# Altium PCB CUv2.PcbDoc
Units mil, origin at the board's own origin, x right, y up, seen from the top; angles counter-clockwise.
Board outline 1496.06 x 1259.84 mil, 2 copper layers (Top Layer, Bottom Layer); 50 components, 41 nets, 186 pads, 21 vias.
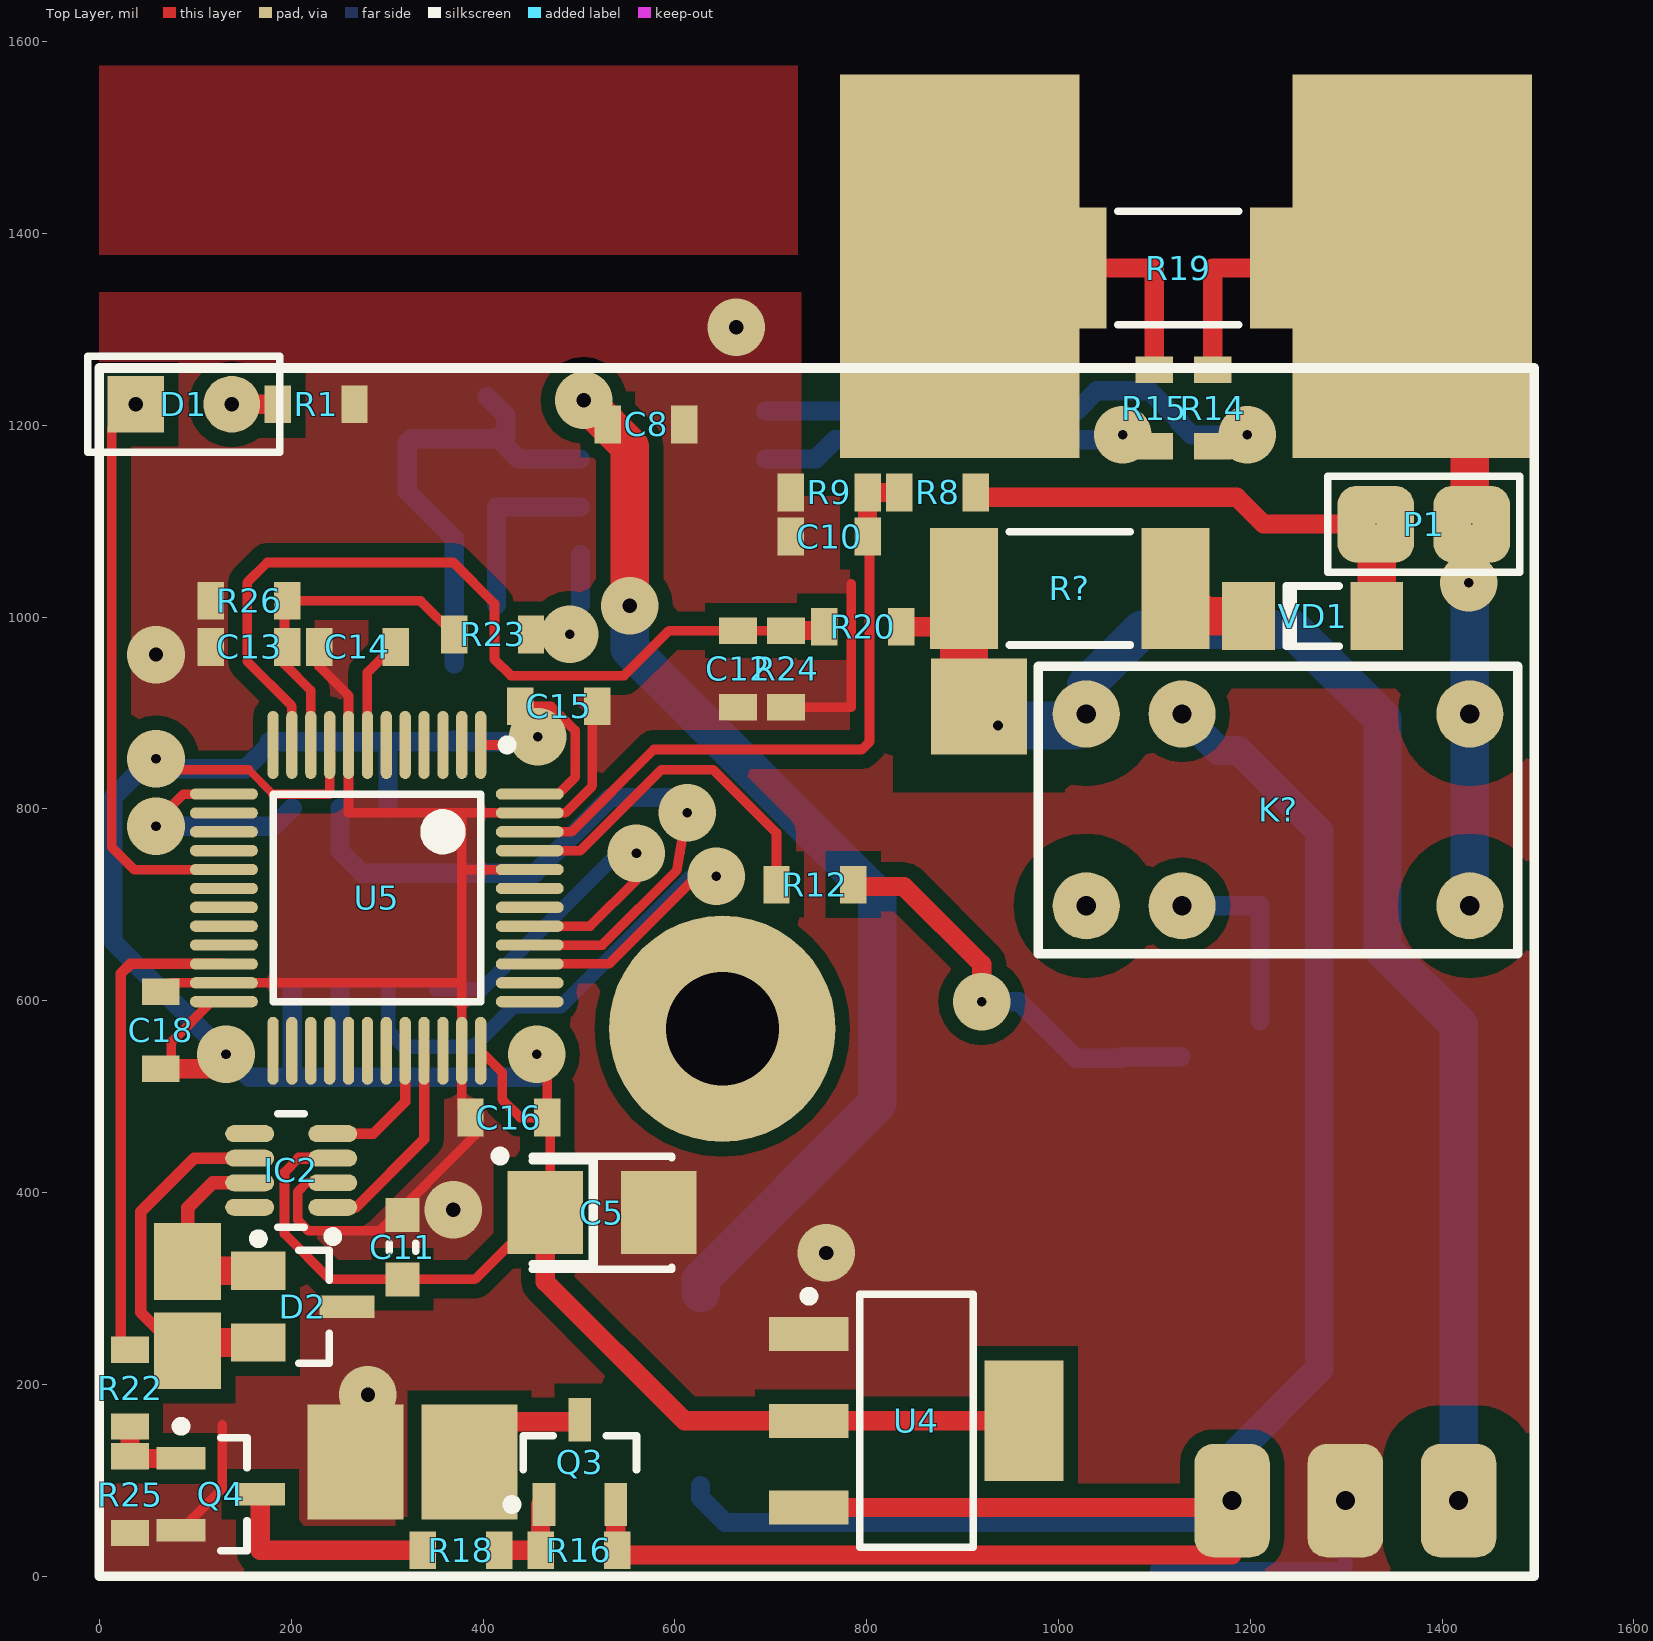
[diagram p0: Top Layer view]
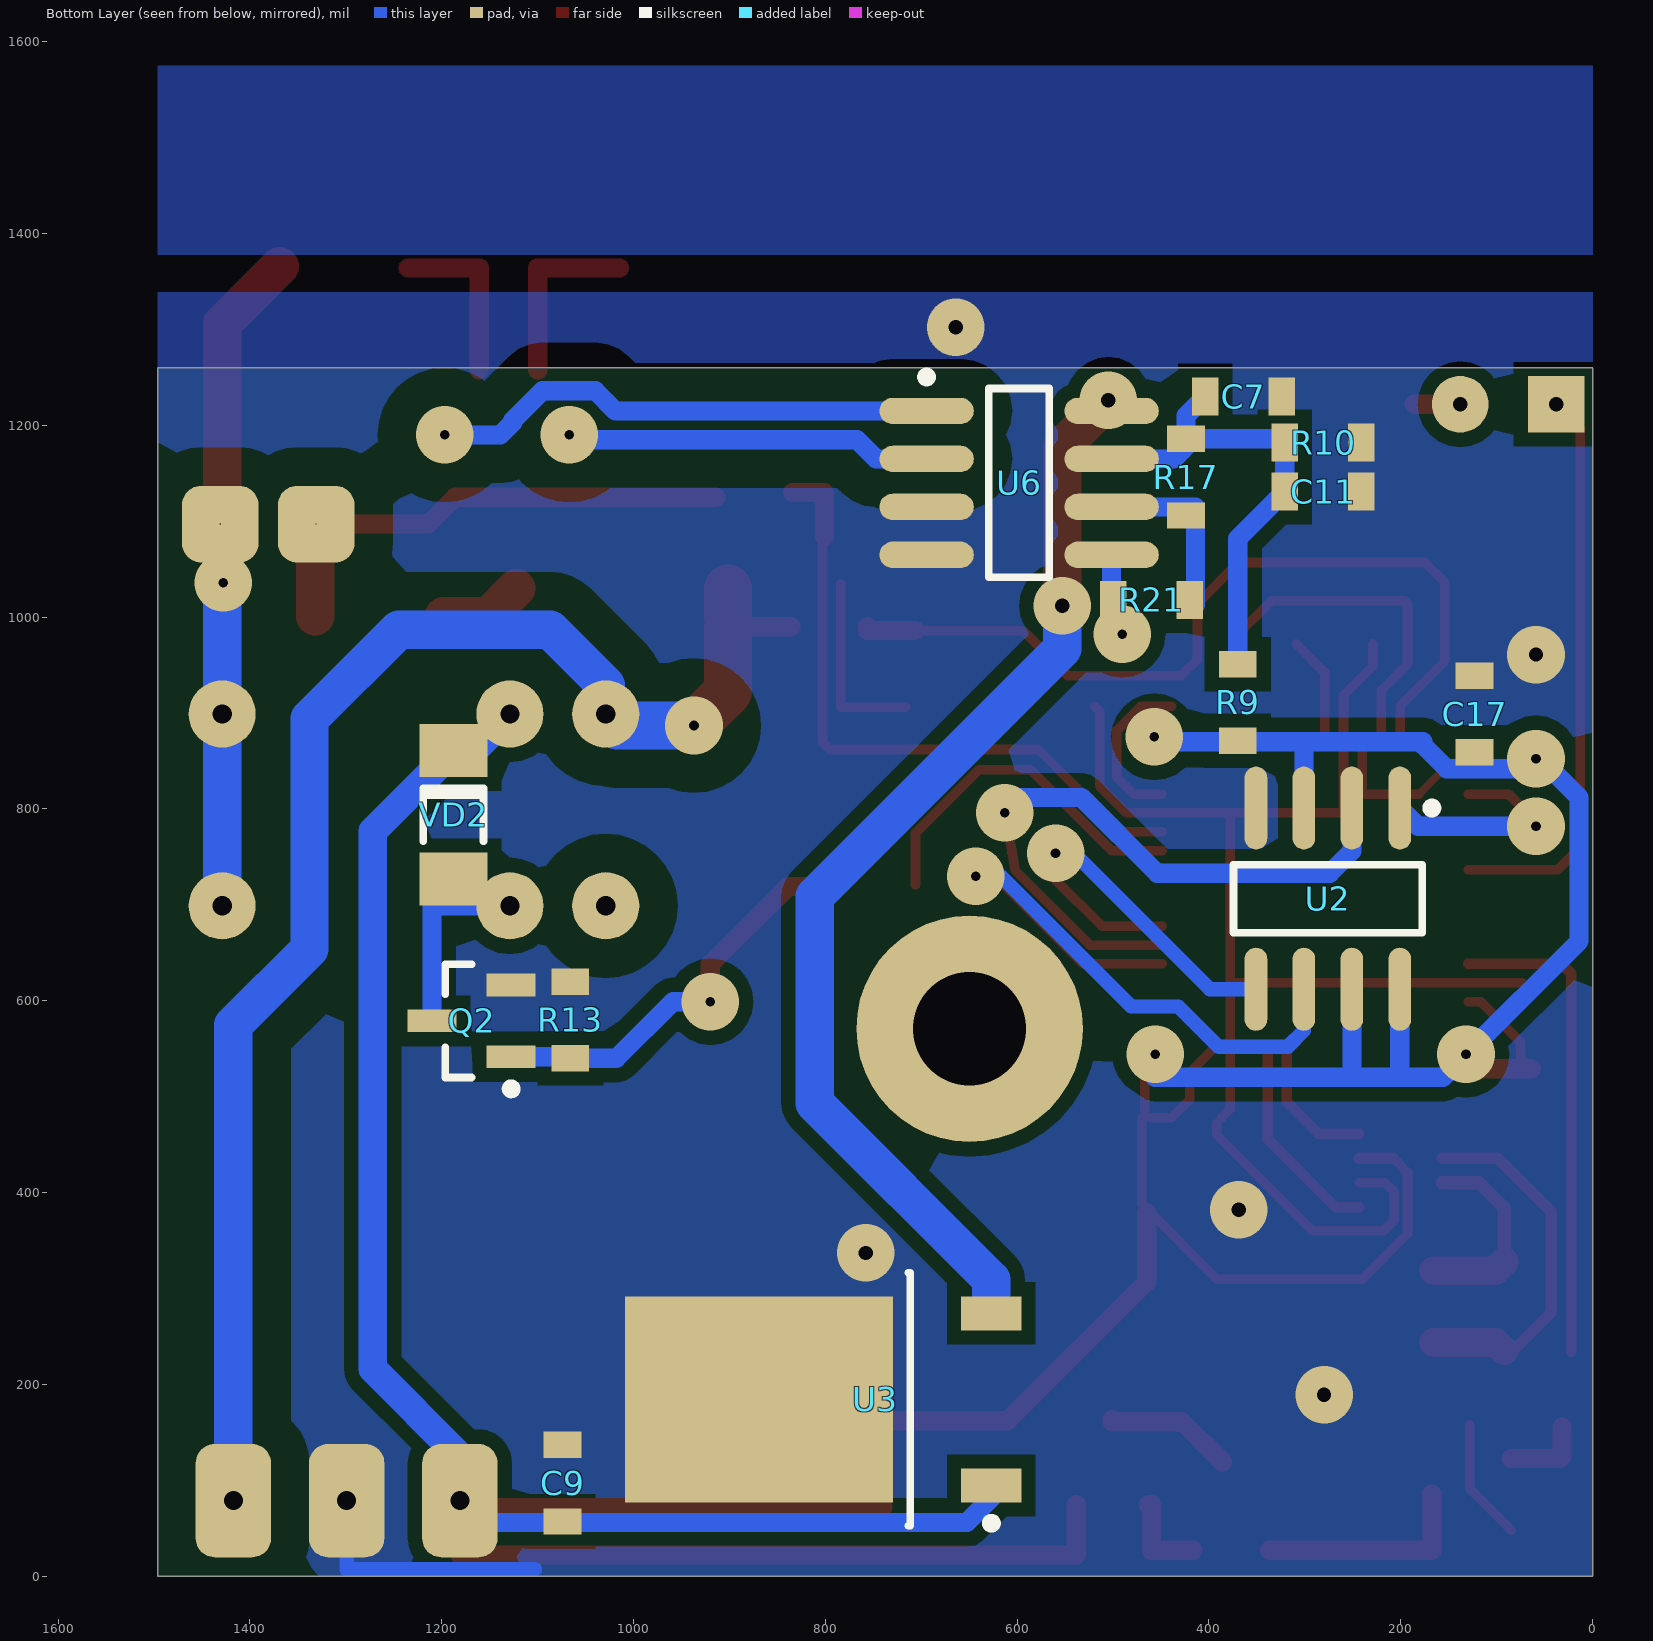
[diagram p1: Bottom Layer view, seen from below]

## Layer stack, top to bottom
Top Solder: solder mask 0.4, Solder Resist, Dk 3.5
Top Layer: signal copper 1.4
Dielectric 1: dielectric 12.6, FR-4, Dk 4.8
Bottom Layer: signal copper 1.4
Bottom Solder: solder mask 0.4, Solder Resist, Dk 3.5

## Board outline
0,0 0,1259.84 1496.06,1259.84 1496.06,0

## Design rules (kind name [scope] priority, off if disabled: settings)
Clearance Clearance_1 [InNetClass('HV')] p1: gap=5 ignorepadtopadclearanceinfootprint=FALSE except(0: Arc-Hole Track-Hole SMDPad-Hole THPad-Hole Via-Hole Fill-Hole Poly-Hole Region-Hole Text-Hole; 40: Arc-Fill Arc-Poly Arc-Region Track-Fill Track-Poly Track-Region SMDPad-Fill SMDPad-Poly SMDPad-Region THPad-Fill THPad-Poly THPad-Region Via-Fill Via-Poly Via-Region Fill-Fill Fill-Poly Fill-Region Poly-Poly Poly-Region Region-Region)
Clearance [All] p2: gap=5 ignorepadtopadclearanceinfootprint=FALSE except(0: Arc-Hole Track-Hole SMDPad-Hole THPad-Hole Via-Hole Fill-Hole Poly-Hole Region-Hole Text-Hole; 15: Arc-Fill Arc-Poly Arc-Region Track-Fill Track-Poly Track-Region SMDPad-Fill SMDPad-Poly SMDPad-Region THPad-Fill THPad-Poly THPad-Region Via-Fill Via-Poly Via-Region Fill-Fill Fill-Poly Fill-Region Poly-Poly Poly-Region Region-Region)
ComponentClearance [All] p1 off: gap=10 collisioncheckmode=3 verticalgap=10 showdistances=FALSE
Height [All] p1 off: minheight=0 maxheight=1000 prefheight=500
MinimumSolderMaskSliver [All] p1 off: minsoldermaskwidth=10
PolygonConnect [All] p1: connectstyle=Direct reliefconductorwidth=10 reliefentries=4 polygonreliefangle="90 Angle" airgapwidth=10
RoutingVias [All] p1: holewidth=28 width=60 viastyle="Through Hole" minholewidth=1 minwidth=1 maxholewidth=280 maxwidth=500
SilkToSilkClearance [All] p1 off: silktosilkclearance=10
SilkToSolderMaskClearance [IsPad] p1 off: minsilkscreentomaskgap=10 clearancetoexposedcopper=TRUE
SolderMaskExpansion [All] p1: expansion=4
Width [All] p1: maxlimit=200 minlimit=5 preferedwidth=10
25 further rules are at their usual default settings.

## Classes and differential pairs
net class HV: 48S 48V 48V_CONN ___1 NetK?_2 NetP1_2 NetR14_1 NetR15_1 NetR?_1
net class CAN: CAN_RX CAN_TX

## Components (designator, comment, footprint, x,y, rotation, side; value= is the part's Value field where it differs from the comment)
C5 "1000u 25V" RR_B 524,379 r0 top value=100pF
C7 "Cap" 0603x 364,1230 r180 bottom value=10n
C8 "Cap" 0603x 570,1201 r0 top value=10n
C9 "Cap" 0603x 1074,97 r90 bottom value=10n
C10 "Cap" 0603x 761,1084 r180 top value=10n
C11 "Cap" 0603x 281,1131 r180 bottom value=10n
C11 "0.1u" CAPC1608X08N(0603) 316,343 r270 top value="CAP CER 0.1UF 50V X7R 0603"
C12 "Cap" 0603x 666,946 r270 top value=10n
C13 "Cap" 0603x 156,969 r180 top value=10n
C14 "Cap" 0603x 269,969 r0 top value=100nF
C15 "Cap" 0603x 479,907 r180 top value=100nF
C16 "Cap" 0603x 426.98,478.17 r0 top value=100nF
C17 "Cap" 0603x 123,899 r270 bottom value=100nF
C18 "Cap" 0603x 63.98,569.17 r270 top value=100nF
D1 "LED0" HDR1X2#1 38,1222 r0 top
D2 "NUP2105LT1G" SOT-23_M 212,281 r0 top
IC2 "TCAN332GDCNT" SOT23-8_L 200,423 r180 top
K? "Relay" RELAY_12V_MICRO 1129,799 r180 top
P1 "Header 2" HDR1X2#2 1431,1097 r180 top
Q2 "2N7002" SOT23_N 1169,579 r0 bottom
Q3 "IRLML6401" Micro3_N 501,119 r90 top
Q4 "2N7002" SOT23_N 126.34,85.4 r0 top
R1 "Res1" 0603x 226,1222 r0 top value=1K
R8 "Res1" 0603x 874,1130 r0 top value=18k
R9 "Res1" 0603x 370,911 r270 bottom value=18k
R9 "Res1" 0603x 761,1130 r0 top value=18k
R10 "Res1" 0603x 281,1182 r0 bottom value=18k
R12 "Res1" 0603x 746,721 r0 top value=1K
R13 "Res1" 0603x 1066,580 r270 bottom value=1K
R14 "Res1" 0603x 1161,1218 r90 top value=1K
R15 "Res1" 0603x 1100,1218 r90 top value=1K
R16 "Res1" 0603x 500,27 r180 top value=1K
R17 "Res1" 0603x 424,1146 r270 bottom value=1K
R18 "Res1" 0603x 377,27 r180 top value=1K
R19 "Res1" 2512 1125,1364 r0 top value=10mR
R20 "Res1" 0603x 796,990 r180 top value=1K
R21 "Res1" 0603x 460,1018 r0 bottom value=1K
R22 "Res1" 0603x 32,196 r270 top value=1K
R23 "Res1" 0603x 410,982 r180 top value=1K
R24 "Res1" 0603x 716,946 r270 top value=1K
R25 "Res1" 0603x 32,85 r90 top value=1K
R26 "Res1" 0603x 156,1017 r0 top value=1K
R? "Res1" 2512 1012,1030 r180 top value=18k
U2 "25AA010A-I/MS" SO-8_N 276,706.49 r270 bottom
U3 "LM78M05CDTX" TO-252AA_L 802.07,184.3 r0 bottom
U4 "REG1117-3.3" SOt-223_L 852,162 r0 top
U5 "STM32F303C8T6" LQFP48_N 289.29,707.27 r270 top
U6 "MAX9918" SO8_M 598,1140 r180 bottom
VD1 "Diode" SOD-80/MLL34 1265,1001 r180 top
VD2 "Diode" SOD-80/MLL34 1188,794 r90 bottom

## Footprints (in the part's own frame and the unit in brackets; to place one, negate y for a bottom-side part, rotate by r counter-clockwise, add the part's x,y. Pads: shape width x height; smd on the part's side, far side on the other; paste and mask are expansions set on the pad)
0603x [mm] "Chip Resistor; Body 1.6 x 0.8 mm (LxW typ)"
  rect 0.7x1 smd: 1(-1.016,0) 2(1.016,0)
2512 [mm] "Chip Resistor; Body 6.4 x 3.2 mm (LxW typ)"
  rect 1.8x3.2 smd: 1(-2.8,0) 2(2.8,0)
  silkscreen extent -1.6,-1.5 1.6,1.5
CAPC1608X08N(0603) [mm] "Chip Capacitor, 2-Leads, Body 1,60x0,80mm, IPC Medium Density"
  rect 0.9x0.9 smd: 1(-0.85,0) 2(0.85,0)
  silkscreen extent -0.1,-0.35 0.1,0.35, body extent -0.8,-0.4 0.8,0.4, height 0.8
HDR1X2#1 [mm] "Connector; Header; 2 Position"
  rect 1.5x1.5 hole 0.381: 1(0,0)
  round 1.5 hole 0.381: 2(2.54,0)
  silkscreen extent -1.27,-1.27 3.81,1.27
HDR1X2#2 [mm] "Connector; Header; 2 Position"
  rrect50% 2.032x2.032 hole 0.025: 1(0,0) 2(2.54,0)
  silkscreen extent -1.27,-1.27 3.81,1.27
LQFP48_N [mm] "Thin QFP, 48-Leads, Body 7x7mm, Pitch 0.5mm, IPC Medium Density"
  oval 1.8x0.3 smd: 1(-4.05,2.75) 2(-4.05,2.25) 3(-4.05,1.75) 4(-4.05,1.25) 5(-4.05,0.75) 6(-4.05,0.25) 7(-4.05,-0.25) 8(-4.05,-0.75) 9(-4.05,-1.25) 10(-4.05,-1.75) 11(-4.05,-2.25) 12(-4.05,-2.75) 25(4.05,-2.75) 26(4.05,-2.25) 27(4.05,-1.75) 28(4.05,-1.25) 29(4.05,-0.75) 30(4.05,-0.25) 31(4.05,0.25) 32(4.05,0.75) 33(4.05,1.25) 34(4.05,1.75) 35(4.05,2.25) 36(4.05,2.75)
  oval 0.3x1.8 smd: 13(-2.75,-4.05) 14(-2.25,-4.05) 15(-1.75,-4.05) 16(-1.25,-4.05) 17(-0.75,-4.05) 18(-0.25,-4.05) 19(0.25,-4.05) 20(0.75,-4.05) 21(1.25,-4.05) 22(1.75,-4.05) 23(2.25,-4.05) 24(2.75,-4.05) 37(2.75,4.05) 38(2.25,4.05) 39(1.75,4.05) 40(1.25,4.05) 41(0.75,4.05) 42(0.25,4.05) 43(-0.25,4.05) 44(-0.75,4.05) 45(-1.25,4.05) 46(-1.75,4.05) 47(-2.25,4.05) 48(-2.75,4.05)
  silkscreen extent -4.17,-2.75 2.75,3.58, body extent -3.5,-3.5 3.5,3.5, height 1.6
Micro3_N [mm] "SOT23, 3-Leads, Body 2.9x1.3mm, Pitch 0.95mm, Lead Span 2.3mm, IPC Medium Density"
  rect 1.15x0.6 smd: 1(-1.125,0.95) 2(-1.125,-0.95) 3(1.125,0)
  silkscreen extent -1.25,-1.5 0.7,1.92, body extent -0.7,-1.5 0.7,1.5, height 1.12
RELAY_12V_MICRO [mil]
  round 70 hole 20: 1(-300,-100) 1(-300,100) 2(100,100) 3(100,-100) 4(0,100) 5(0,-100)
  silkscreen extent -350,-150 150,150, body extent -350,-150 150,150, height 390
RR_B [mm] "Capacitor, SM Tantalum; Body 3.5 x 2.8 mm (LxW typ)"
  rect 2x2.2 smd: 1(-1.5,0) 2(1.5,0)
  silkscreen extent -2.82,-1.5 1.85,1.62, body extent -1.5,-1.5 1.5,1.5, height 2.1
SO8_M [mm] "SOIC, 8-Leads, Body 4.9x3.9mm, Pitch 1.27mm, IPC Low Density"
  oval 2.5x0.7 smd: 1(-2.45,1.905) 2(-2.45,0.635) 3(-2.45,-0.635) 4(-2.45,-1.905) 5(2.45,-1.905) 6(2.45,-0.635) 7(2.45,0.635) 8(2.45,1.905)
  silkscreen extent -2.58,-2.5 0.8,2.93, body extent -2,-2.5 2,2.5, height 1.75
SO-8_N [mm] "SOIC, 8-Leads, Body 4.9x3.9mm, Pitch 1.27mm, IPC Medium Density"
  oval 2.2x0.6 smd: 1(-2.4,1.905) 2(-2.4,0.635) 3(-2.4,-0.635) 4(-2.4,-1.905) 5(2.4,-1.905) 6(2.4,-0.635) 7(2.4,0.635) 8(2.4,1.905)
  silkscreen extent -2.52,-2.5 0.9,2.88, body extent -2,-2.5 2,2.5, height 1.75
SOD-80/MLL34 [mm] "Metal Electrode Face (MELF) Diode; Body 3.5 x 1.7 mm (LxDia)"
  rect 1.4x1.8 smd: 1(-1.7,0) 2(1.7,0)
  silkscreen extent -0.7,-0.8 0.7,0.8
SOT23-8_L [mm] "SOP, 8-Leads, Body 2.9x1.6mm, Pitch 0.65mm, IPC High Density"
  oval 1.3x0.45 smd: 1(-1.1,0.975) 2(-1.1,0.325) 3(-1.1,-0.325) 4(-1.1,-0.975) 5(1.1,-0.975) 6(1.1,-0.325) 7(1.1,0.325) 8(1.1,0.975)
  silkscreen extent -1.22,-1.5 0.35,1.87, body extent -0.88,-1.5 0.88,1.5, height 1.45
SOT23_N [mm] "SOT23, 3-Leads, Body 2.9x1.3mm, Pitch 0.95mm, Lead Span 2.3mm, IPC Medium Density"
  rect 1.3x0.6 smd: 1(-1.05,0.95) 2(-1.05,-0.95) 3(1.05,0)
  silkscreen extent -1.17,-1.5 0.7,1.92, body extent -0.7,-1.5 0.7,1.5, height 1.1
SOT-23_M [mm] "SOT23, 3-Leads, Body 2.9x1.3mm, Pitch 0.95mm, Lead Span 2.5mm, IPC Low Density"
  rect 1.45x1.016 smd: 1(-1.175,0.95) 2(-1.175,-0.95)
  rect 1.45x0.6 smd: 3(1.175,0)
  silkscreen extent -1.3,-1.5 0.7,1.92, body extent -0.7,-1.5 0.7,1.5, height 1.1
SOt-223_L [mm] "SOT223, 4-Leads, Body 6.5x3.5mm, Pitch 2.3mm, Lead Span 7mm, IPC High Density"
  rect 2.1x0.9 smd: 1(-2.85,2.3) 2(-2.85,0) 3(-2.85,-2.3)
  rect 2.1x3.2 smd: 4(2.85,0)
  silkscreen extent -2.97,-3.35 1.5,3.42, body extent -1.85,-3.35 1.85,3.35, height 1.8
TO-252AA_L [mm] "D-PAK, 4-Leads, Body 6.1x6.5mm, Pitch 2.28mm, Lead Span 9.9mm, IPC High Density"
  rect 1.6x0.9 smd: 1(-4.45,2.28) 3(-4.45,-2.28)
  rect 7.1x5.45 smd: 4(1.7,0)
  silkscreen extent -4.57,-3.35 -2.25,3.4, body extent -2.3,-3.37 4.05,3.37, height 2.38

## Part data
C5: library part Cap, "Capacitor", LatestRevisionDate=17-Jul-2002, LatestRevisionNote="Re-released for DXP Platform.", PackageDescription="Radial Cap, Thru-Hole; 2 Leads; 0.3 in Pin Spacing", PackageReference=RAD-0.3, Published=8-Jun-2000, Publisher="Altium Limited"
C7 C8 C9 C10 C11 C12 C13 C14 C15 C16 C17 C18: "Capacitor", LatestRevisionDate=17-Jul-2002, LatestRevisionNote="Re-released for DXP Platform.", PackageDescription="Radial Cap, Thru-Hole; 2 Leads; 0.3 in Pin Spacing", PackageReference=RAD-0.3, Published=8-Jun-2000, Publisher="Altium Limited"
C11: library part "Ceramic Chip Capacitor", Package=0603, Distributor="AVX Corporation", Order Number=06035C104KAT2A
D1: "Typical INFRARED GaAs LED", LatestRevisionDate=08-Jul-2005, LatestRevisionNote="Mech Layer 1 removed.", PackageDescription="LED; 2 Leads", PackageReference=LED-0, Published=8-Jun-2000, Publisher="Altium Limited"
D2: library part BAT54A, "Schottky Barrier Double Diode", Package=SOT23, ComponentLink1Description="Manufacturer Link", ComponentLink1URL=http://www.semiconductors.philips.com/, Distributor="ON Semiconductor", LatestRevisionNote="IPC-7351 Footprint Added.", Order Number=NUP2105LT1G, PackageDescription="3-Pin SOT-23 Package 0.95 mm Pitch, 2.3 mm Lead Span"
IC2: Package=SOT23-8, Distributor="Texas Instruments", Order Number=TCAN332GDCNT
K?: "SPDT Relay", LatestRevisionDate=17-Jul-2002, LatestRevisionNote="Re-released for DXP Platform.", PackageReference=MODULE5B, Published=8-Jun-2000, Publisher="Altium Limited"
P1: "Header, 2-Pin", LatestRevisionDate=17-Jul-2002, LatestRevisionNote="Re-released for DXP Platform.", Publisher="Altium Limited"
Q2 Q4: "N-channel Enhancement Mode Field-effect Transistor", ComponentLink1Description="Manufacturer Link", ComponentLink1URL=http://www.semiconductors.philips.com/, ComponentLink2Description=Datasheet, ComponentLink2URL=http://www.semiconductors.philips.com/acrobat/datasheets/2N7002_4.pdf, DatasheetVersion=27-Jul-2000, LatestRevisionDate=12-Dec-2006, LatestRevisionNote="IPC-7351 Footprint Added.", PackageDescription="3-Pin SOT-23 Package 0.95 mm Pitch, 2.3 mm Lead Span", PackageReference=SOT23, PackageVersion=May-1999, Published=17-Sep-2003, Publisher="Altium Limited"
Q3: "HEXFET Power MOSFET", ComponentLink1Description="Manufacturer Link", ComponentLink1URL=http://www.irf.com/, ComponentLink2Description=Datasheet, ComponentLink2URL=http://www.irf.com/product-info/datasheets/data/IRLML6401.pdf, DatasheetVersion=2-Jul-2001, PackageDescription="3-Pin SOT-23 Package 0.95 mm Pitch, 2.3 mm Lead Span", PackageReference=Micro3, PackageVersion=Jul-2001, Published=17-Sep-2003, Publisher="Altium Limited"
R1 R8 R9 R9 R10 R12 R13 R14 R15 R16 R17 R18 R19 R20 R21 R22 R23 R24 R25 R26 R?: "Resistor", LatestRevisionDate=17-Jul-2002, LatestRevisionNote="Re-released for DXP Platform.", PackageDescription="Axial Device, Thru-Hole; 2 Leads; 0.3 in Pin Spacing", PackageReference=AXIAL-0.3, Published=8-Jun-2000, Publisher="Altium Limited"
U2: "1K SPI Bus Serial EEPROM, 8-Pin MSOP, Industrial Temperature", Supplier Part Number 1=25AA010A-I/MS-ND, ComponentLink1Description=Datasheet, ComponentLink1URL=http://ww1.microchip.com/downloads/en/DeviceDoc/21832E.pdf, ComponentLink2Description="Packaging Specification", ComponentLink2URL=http://www.microchip.com/stellent/groups/techpub_sg/documents/packagingspec/en012702.pdf, ComponentLink3Description="Microchip.com Home", ComponentLink3URL=http://www.microchip.com/, DatasheetVersion="revE, Sep-2008", LatestRevisionDate=02-Dec-2009, LatestRevisionNote="Updated to datasheet revision E, Jan-2008", PackageDescription="8-Lead Plastic Micro Small Outline Package (MS) [MSOP]", PackageReference=MSOP-MS8, PackageVersion="revBB, Aug-2009", Published=29-Jan-2009, Publisher="Altium Limited", Supplier 1=Digi-Key, Supplier 2=Farnell, Supplier Part Number 2=1331337
U3: "3-Terminal Positive Voltage Regulators, 3-pin TO-252", Manufacturer="National Semiconductor", PackageTopMarking=NSUZXYTT*LM78M05*CDT, PowerWise=N, Code_JEDEC=TO-252-AA, ComponentLink1Description="LM78M05 Datasheet", ComponentLink1URL=http://www.national.com/ds/LM/LM78M05.pdf, ComponentLink2Description="LM78M05 Web Page", ComponentLink2URL=http://www.national.com/pf/LM/LM78M05.html, ComponentLink3Description="TD03B Package Page", ComponentLink3URL=http://www.national.com/packaging/folders/td03b.html, CompType="LDO IC", DatasheetVersion=Aug-2005, PackageDescription="TO252, Molded, Jedec, 6.8 x 6.10 x 2.30mm Body, 3 Lead, 2.28mm Pitch, Surface Mount", PackageReference=TD03B, PackageVersion="revD, Feb-2009", PartNumber=LM78M05CDTX, PinCount=3, Published=1-Mar-2010, Publisher="Altium Limited", RoHS=N
U4: "800mA and 1A Low Dropout Positive Regulator 2.85V, 3.3V, 5V, and Adjustable", ComponentLink1Description="Manufacturer Link", ComponentLink1URL=http://www.ti.com/, ComponentLink2Description=Datasheet, ComponentLink2URL=http://www-s.ti.com/sc/ds/REG1117.pdf, DatasheetVersion=Sep-1997, LatestRevisionDate=17-Jul-2002, LatestRevisionNote="Re-released for DXP Platform.", PackageDescription="SOT-223/SC-73; 4 Leads; Body 6.7 x 7.3 mm, inc. leads (LxW max)", PackageReference=ZZ311, PackageVersion=revC, Published=8-Jun-2000, Publisher="Altium Limited"
U5: library part STM32F103C6T6, "STM32 ARM-based 32-bit MCU with 32 Kbytes Flash, 48-pin LQFP, Industrial Temperature", ComponentLink1Description="Manufacturer Link", ComponentLink1URL=www.st.com/stm32, ComponentLink2Description=Datasheet, ComponentLink2URL=http://www.st.com/stonline/products/literature/ds/13587.pdf, DatasheetVersion="rev6, Mar-2008", PackageDescription="48-Pin Low-Profile Quad Flat Pack, 7 x 7 mm Body, 0.5 mm Pitch (LQFP48)", PackageReference=LQFP48, PackageVersion=Mar-2008, Published=30-May-2008, Publisher="Altium Limited"
VD1 VD2: "Default Diode", Code_JEDEC=DO-214-AB, LatestRevisionDate=17-Jul-2002, LatestRevisionNote="Re-released for DXP Platform.", PackageDescription="DO-214-AB/SMC; 2 C-Bend Leads; Body 7.9 x 5.9 mm, inc. leads (LxW)", PackageReference=SMC, PackageVersion=Sep-1996, Published=8-Jun-2000, Publisher="Altium Limited"

## Free pads (board coordinates)
  rect 250x400 smd: 2(897,1366) 2(1369,1366)
  rect 100x100 smd: 2(917,907)
  rect 100x120 smd: 3(267,119) 3(386,119)
  round 236.22 hole 118.11: 4(649.61,570.87)
  rrect50% 78.74x118.11 hole 20: 5(1417.32,78.74) 6(1299.21,78.74) 7(1181.1,78.74)
  rect 70x80 smd: 8(92,235) 9(92,328)

## Via types
v1: diameter 60, hole 10, Top Layer to Bottom Layer, 14 vias
v2: diameter 60, hole 15, Top Layer to Bottom Layer, 7 vias

## Nets (pads, with @x,y where several pads share a name; then routed paths per layer and width w, separated by ;. In a path a pad name is that pad's centre, name@x,y a point inside that pad or via, vN(x,y) a via of type N, cw(c..) or ccw(c..) an arc to the next point about the centre after c; other vN are vias at no path point)
3V3: C5.1 C11.2@316,309.54 C15.2 C16.2 C17.2 C18.2 IC2.3 R9.2@370,871 U2.3 U2.7 U2.8 U4.2 U4.4 U5.1 U5.9 U5.24 U5.36 U5.48 | length 3389.2
  Top Layer w8: 155.56,841 181.02,815.54
  Top Layer w10: C18.2 74.98,540.17 74.98,557.17 116.81,599 U5.24 ; v1@68,841 155.56,841 ; 181.02,815.54 240.08,815.54 U5.9 ; 207.8,435.8 193,421 193,357 240.46,309.54 316,309.54 391.48,309.54 470,388.06 470,478.17 C16.2 466.98,533.17 v1(455.98,544.17) ; U5.36 419.98,525.4 419.98,497.17 438.98,478.17 C16.2@460,478.17 ; U5.1 448.53,866.72 v1(456.98,875.17) ; C15.2 471,907 496,882 496,833 478.54,815.54 U5.48
  Top Layer w12: 207.8,435.8 IC2.3
  Top Layer w20: C18.2 116.98,529.17 v1(131.98,544.17) ; C5.1 464.94,307.06 610,162 U4.2 U4.4
  Bottom Layer w20: U2.8 201,522.17 199,520.17 ; U2.7 251,522.17 253,520.17 ; U2.3 301,870 ; R9.2@369,872 370,871 R9.2@371,870 ; v1@455.98,520.17 253,520.17 ; v1(456.98,875.17) 456.98,870 R9.2@371,870 ; 199,520.17 155.98,520.17 v1(131.98,544.17) 14,662.14 14,812 54.19,852.19 v1(59,852.19) 70.19,852.19 80.37,842 152,842 177,867 177,870 301,870 ; 199,520.17 253,520.17 ; 301,870 R9.2@371,870
5V: C8.1 U3.3 U6.8 | length 1146.2
  Top Layer w40: v2(505,1226) C8.1 553,1178 v2(553,1012)
  Bottom Layer w20: U6.8 505,1218.46 v2(505,1226)
  Bottom Layer w40: v2(553,1012) 553,967 811,709 811,493 626.87,308.87 626.87,295.28
12V: C9.1 K?.5 pad.7 Q3.2 R16.1 U3.1 U4.3 VD2.2 | length 2716
  Top Layer w20: Q3.2 538.4,22 1181.1,22 1181.1,71.45 U4.3
  Bottom Layer w20: U3.1 626.87,81.79 652.66,56 1181.1,56 pad.7
  Bottom Layer w30: K?.5 1167.07,860.93 VD2.2 1272,776.93 1272,216 1181.1,125.1 pad.7
48S: K?.1 P1.1 pad.2@1369,1366 R14.2 R19.2 | length 870.5
  Top Layer w20: R14.2 1161,1364 R19.2
  Top Layer w40: pad.2@1369,1366 1429,1306 v1@1429,1038
  Bottom Layer w40: v1(1428,1036) 1429,1035 1429,899 K?.1@1429,699
48V: K?.3 pad.2@917,907 pad.5 R20.1 R?.2 | length 1553
  Top Layer w20: R20.1 901.76,990 R?.2@901.76,1000
  Top Layer w50: R?.2@901.76,990 901.76,922.24 917,907 pad.2@925,899 ; R?.2@901.76,1000 R?.2
  Bottom Layer w40: K?.3 1029,929 1087,987 1245,987 1338,894 1338,654 1417.32,574.68 pad.5
  Bottom Layer w50: v1(937,887) 1017,887 K?.3
48V_CONN: pad.2@897,1366 R15.2 R19.1 | length 191.2
  Top Layer w20: R19.1 1100,1364 R15.2
___1: K?.2
BTN: C10.1 R8.1 R9.2@801,1130 U5.46 | length 687
  Top Layer w10: U5.46 492.17,776.17 578,862 795,862 803,870 803,1082 C10.1
  Top Layer w20: C10.1 801,1130 R8.1
C\S\: U2.1 U5.13 | length 245.6
  Top Layer w10: v1@60,782 v1(59,782) 54,782 87.54,815.54 U5.13
  Bottom Layer w20: v1(59,782) 182.02,782 U2.1
CAN_H: D2.1 IC2.7 pad.9 | length 209.3
  Top Layer w14: pad.9 92,384 118.2,410.2 IC2.7
  Top Layer w30: pad.9 101.6,318.4 D2.1
CAN_L: D2.2 IC2.6 pad.8 | length 384.7
  Top Layer w12: pad.8 83,235 43,275 43,380 98.79,435.79 IC2.6
  Top Layer w30: pad.8 100.6,243.6 D2.2
CAN_RX: IC2.4 U5.32 | length 142.4
  Top Layer w11: IC2.4 285.39,461.39 318.82,494.82 U5.32
CAN_TX: IC2.1 U5.33 | length 216.9
  Top Layer w11: IC2.1 267.61,384.61 338.5,455.5 U5.33
GND: C5.2 C7.2 C8.2 C9.2 C10.2 C11.1@316,376.46 C11.2@241,1131 C12.2 C13.2 C14.1 C15.1 C16.1 C17.1 C18.1 D2.3 IC2.2 pad.3@267,119 pad.6 Q2.2 Q4.2 R1.2 R9.1@721,1130 R10.1 R13.1 R24.2 R25.1 R26.1 U2.4 U3.4 U4.1 U5.8 U5.23 U5.35 U5.44 U5.47 U6.3 U6.4 | length 2155.2
  Top Layer w10: C18.1 73.5,618.69 U5.23 377.87,618.69 ; Q4.2 128,91 128,158 ; 207,371 207,401 216.2,410.2 IC2.2 ; 208,371 208,370 218,360 292,360 391.91,459.91 C16.1@391.91,472.09 ; C14.1@229,972 C14.1 229,949 259.76,918.24 U5.8 259.76,795.85 377.87,795.85 ; C16.1 377.87,487.27 U5.35 377.87,618.69 ; U5.44 377.87,736.8 ; C15.1 514,902 514,824 485.85,795.85 U5.47 377.87,795.85 ; R24.2 784,906 784,1034.69 ; 377.87,618.69 377.87,736.8 ; 377.87,736.8 377.87,795.85
  Bottom Layer w15: 1103,7 1299.21,7 pad.6
  other v2: 280,189 758,337 369,382 59,961 663.97,1302.41
I_SNS: C13.1 R23.2 R26.2 U5.10 | length 351.4
  Top Layer w10: U5.10 220.39,923.61 193,951 193,1014 R26.2 335,1017 R23.2
LED: D1.1 U5.17 | length 598.8
  Top Layer w10: D1.1 13,1197 13,760 36.2,736.8 U5.17
LIGHT: pad.3@386,119 Q3.3 | length 134.7
  Top Layer w20: pad.3@386,119 428,161 501,161 Q3.3
NetC14_2: C14.2 U5.7 | length 117.5
  Top Layer w10: U5.7 279.45,942.45 C14.2@309,972
NetD1_2: D1.2 R1.1 | length 48
  Top Layer w20: D1.2 R1.1
NetK?_4: K?.4 Q2.3 VD2.1 | length 201.3
  Bottom Layer w20: K?.4 1210.34,699 Q2.3
NetP1_2: P1.2 R8.2 VD1.1 | length 525
  Top Layer w20: R8.2@914,1125 1186,1125 1214,1097 P1.2
  Top Layer w40: P1.2 1331.93,1096.07 VD1.1
NetQ2_1: Q2.1 R12.2 R13.2 | length 441.1
  Top Layer w20: R12.2 788,719 839,719 920,638 v1(920,599)
  Bottom Layer w20: v1(920,599) 959,599 1018,540 R13.2 1066,541.6 Q2.1
NetQ3_1: Q3.1 R16.2 R18.1 | length 94.3
  Top Layer w20: R18.1 R16.2 460,74.71 Q3.1
NetQ4_1: Q4.1 R22.2 R25.2 | length 84.9
  Top Layer w20: R22.2 R25.2 34.2,122.8 Q4.1
NetQ4_3: Q4.3 R18.2 | length 227.7
  Top Layer w20: Q4.3 167.68,27 R18.2
NetR14_1: R14.1 U6.1 | length 531.5
  Bottom Layer w20: U6.1 1019,1215 1040,1236 1095,1236 1126,1205 1126,1203 1139,1190 v1(1197,1190)
NetR15_1: R15.1 U6.2 | length 382.9
  Bottom Layer w20: U6.2 747,1165 767,1185 1062,1185 v1(1067,1190)
NetR17_2: R17.2 R21.1 U6.6 | length 189.5
  Bottom Layer w20: R21.1@414,1013 414,1115 U6.6
NetR21_2: R21.2 R23.1 U6.5 | length 52
  Bottom Layer w20: R21.2@501.54,1013 U6.5
  other v1: 490.5,982
NetR?_1: R?.1 VD1.2 | length 87.8
  Top Layer w40: R?.1 1151.24,1001 VD1.2
POWER: R12.1 U5.45 | length 373.6
  Top Layer w10: U5.45 501.48,756.48 586,841 640,841 706,775 R12.1
PWM_LIGHT: R22.1 U5.22 | length 506.1
  Top Layer w11: R22.1@22,234 22,628 32.37,638.37 U5.22
SCK: U2.6 U5.39 | length 698
  Top Layer w10: U5.39 531.37,638.37 623,730 v1(643,730)
  Bottom Layer w15: U2.6 301,569 318,552 390,552 432,594 481,594 617,730 v1(643,730)
SCL: U5.6
SDA: U5.5
SI: U2.5 U5.41 | length 427.1
  Top Layer w10: U5.41 511.74,677.74 560,726 v1(560,754)
  Bottom Layer w15: U2.5 399,612 v1@541,754
  Bottom Layer w20: v1@541,754 v1(560,754)
SO: U2.2 U5.40 | length 727.5
  Top Layer w10: U5.40 524.06,658.06 602,736 605.37,754.37 v1(613,796) ccw(c613,780) v1@597,780
  Bottom Layer w20: U2.2 251,756 274,733 454,733 533,812 597,812 v1(613,796)
SWCLK: U5.37
SWDIO: U5.34
V_SNS: C12.1 R20.2 R24.1 U5.11 | length 905.7
  Top Layer w10: U5.11 200.71,907.29 154,954 154,1036 175,1057 369,1057 412,1014 412,956 429,939 547,939 594,986 C12.1 R24.1@706,986
  Top Layer w20: R24.1@706,986 R24.1 756,986 R20.2
Vref: C7.1 C11.1@321,1131 R9.1@370,951 R10.2 R17.1 U6.7 | length 505.3
  Bottom Layer w20: R9.1@370,951 370,1082 321,1131 R10.2 325,1186 R17.1@416,1186 ; C7.1 424,1210 R17.1 R17.1@416,1186 ; R17.1@414,1188 R17.1@416,1186 ; U6.7 437,1165 R17.1@416,1186
pads on no net: IC2.5 IC2.8 U5.2 U5.3 U5.4 U5.12 U5.14 U5.15 U5.16 U5.18 U5.19 U5.20 U5.21 U5.25 U5.26 U5.27 U5.28 U5.29 U5.30 U5.31 U5.38 U5.42 U5.43

## Polygon pours and split planes (outlines as drawn)
no net on Top Layer "NONET_L01_P004" (solid, pour order 4): 0,1377.95 728.35,1377.95 728.35,1574.8 0,1574.8
GND on Top Layer "G" (solid, remove dead copper, pour order 0): 0,0 0,1338.58 1496.06,1338.58 1496.06,0
GND on Bottom Layer "G" (solid, remove dead copper, pour order 2): 0,0 0,1338.58 1496.06,1338.58 1496.06,0
no net on Bottom Layer "NONET_L02_P006" (solid, pour order 6): 0,1377.95 1496.06,1377.95 1496.06,1574.8 0,1574.8

## Silkscreen, mask and mechanical layers (free items; w line width, h text height)
Top Overlay:
  the board outline again, w10